# Altium PCB Car_PCB.PcbDoc (part 1 of 2)
Units mm, origin at the board's own origin, x right, y up, seen from the top; angles counter-clockwise.
Board outline 64 x 85 mm, 4 copper layers (Top Layer, Ground Plane, Power Plane, Bottom Layer), stack 0.844 mm thick; 133 components, 86 nets, 370 pads, 90 vias.
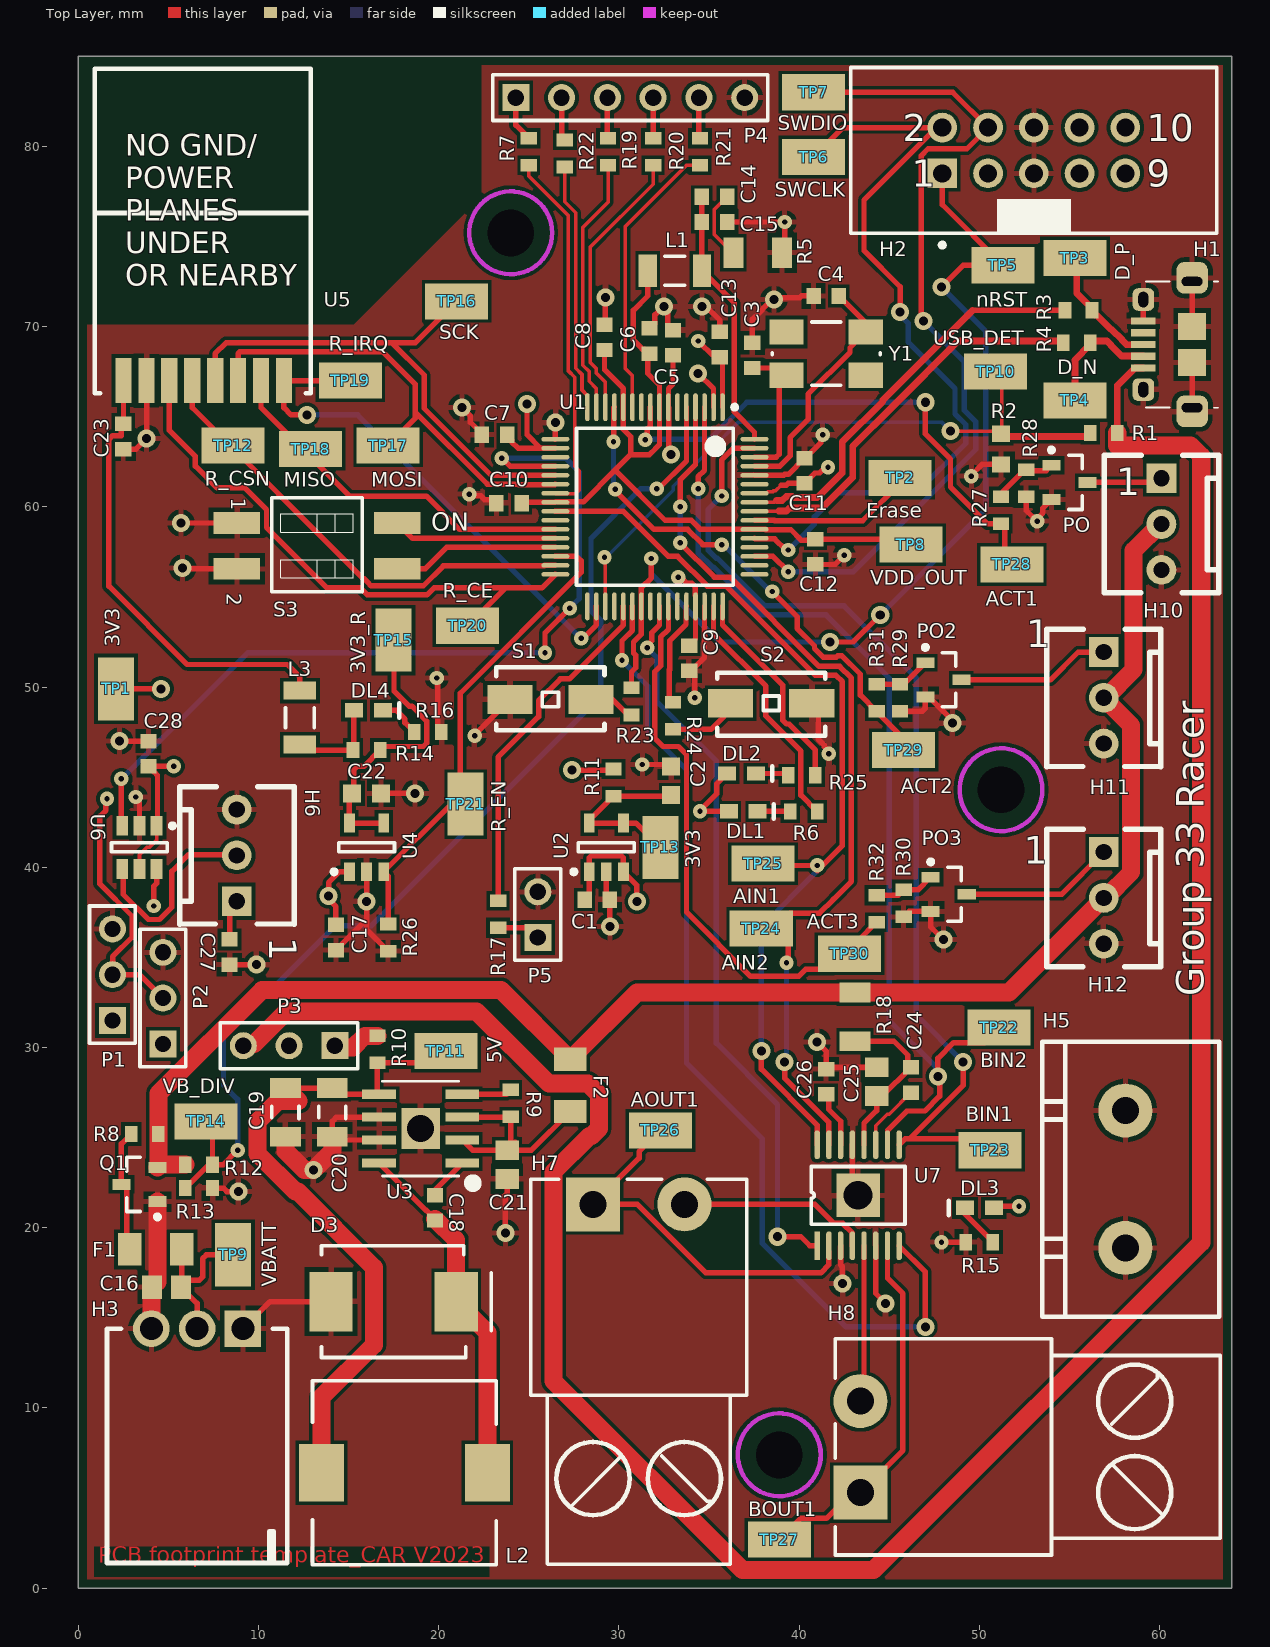
[diagram p0: Top Layer view]
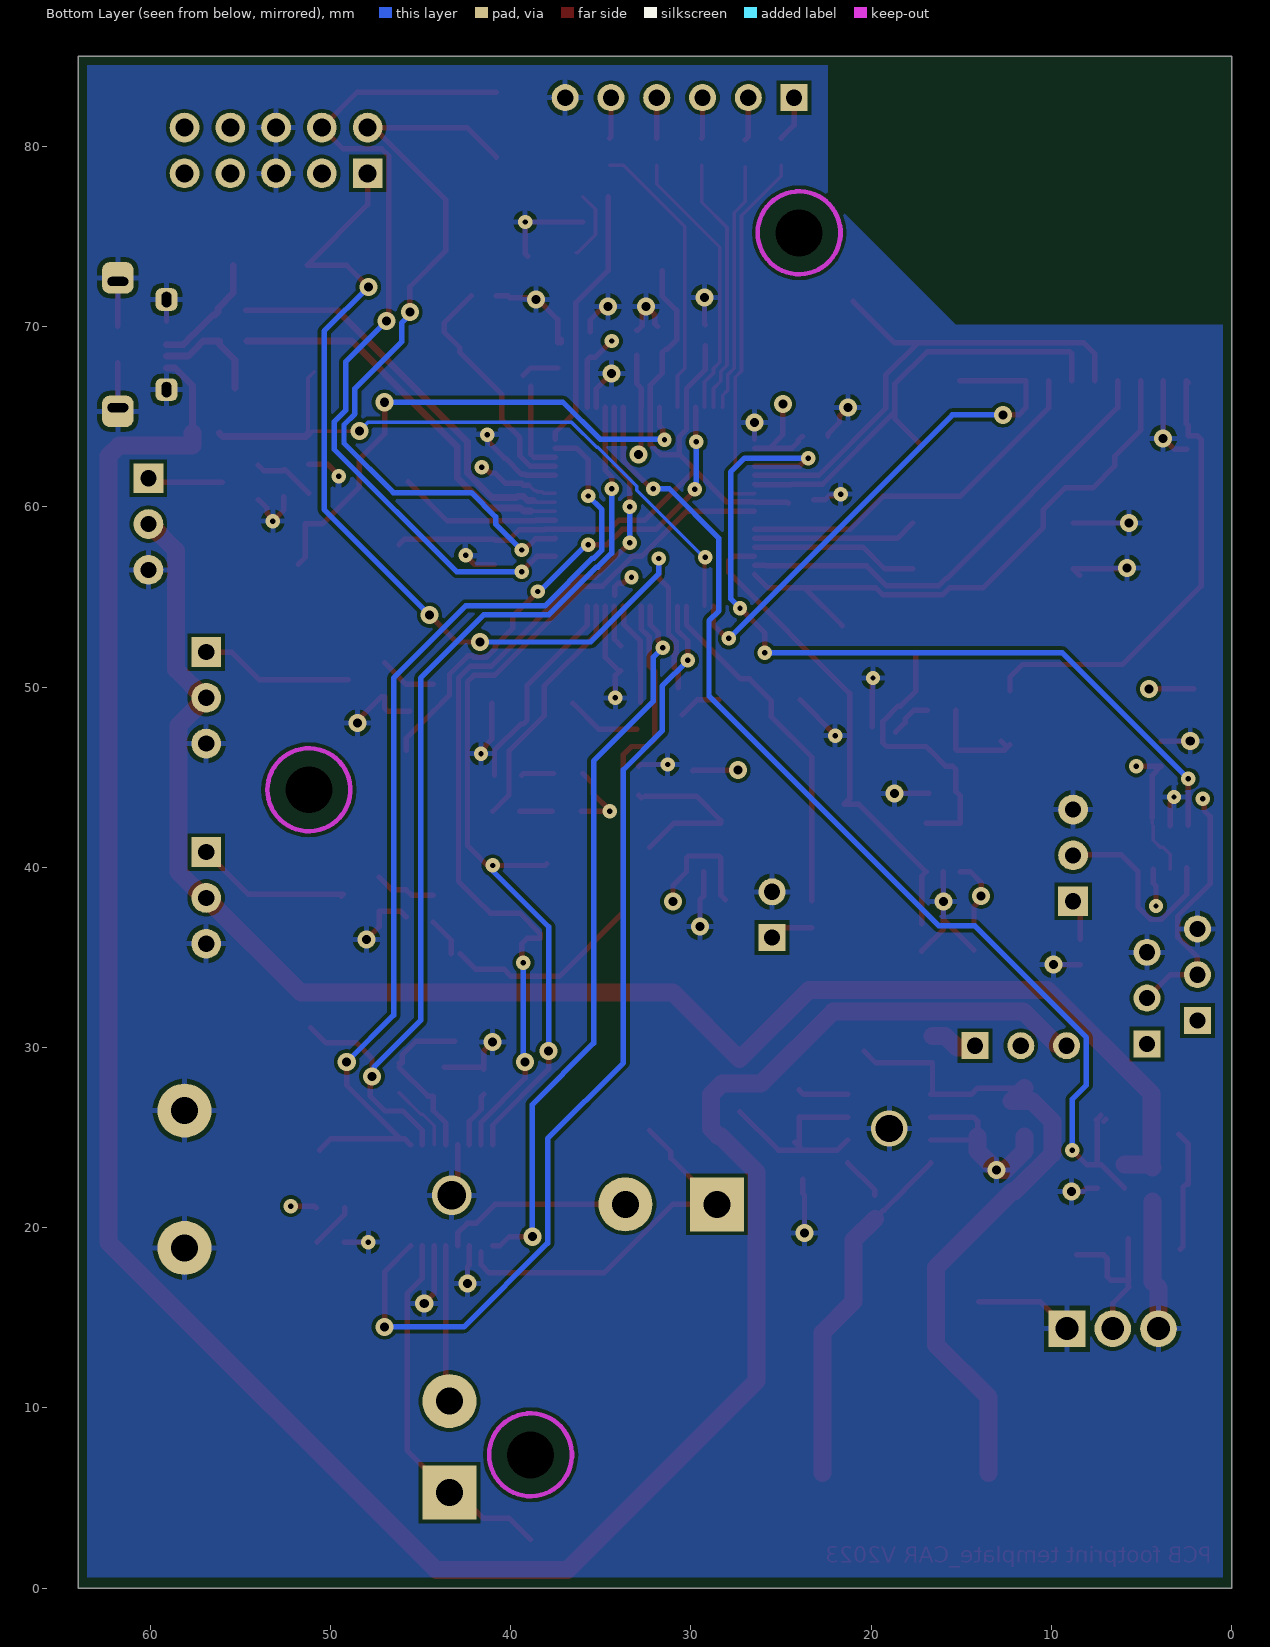
[diagram p1: Bottom Layer view, seen from below]
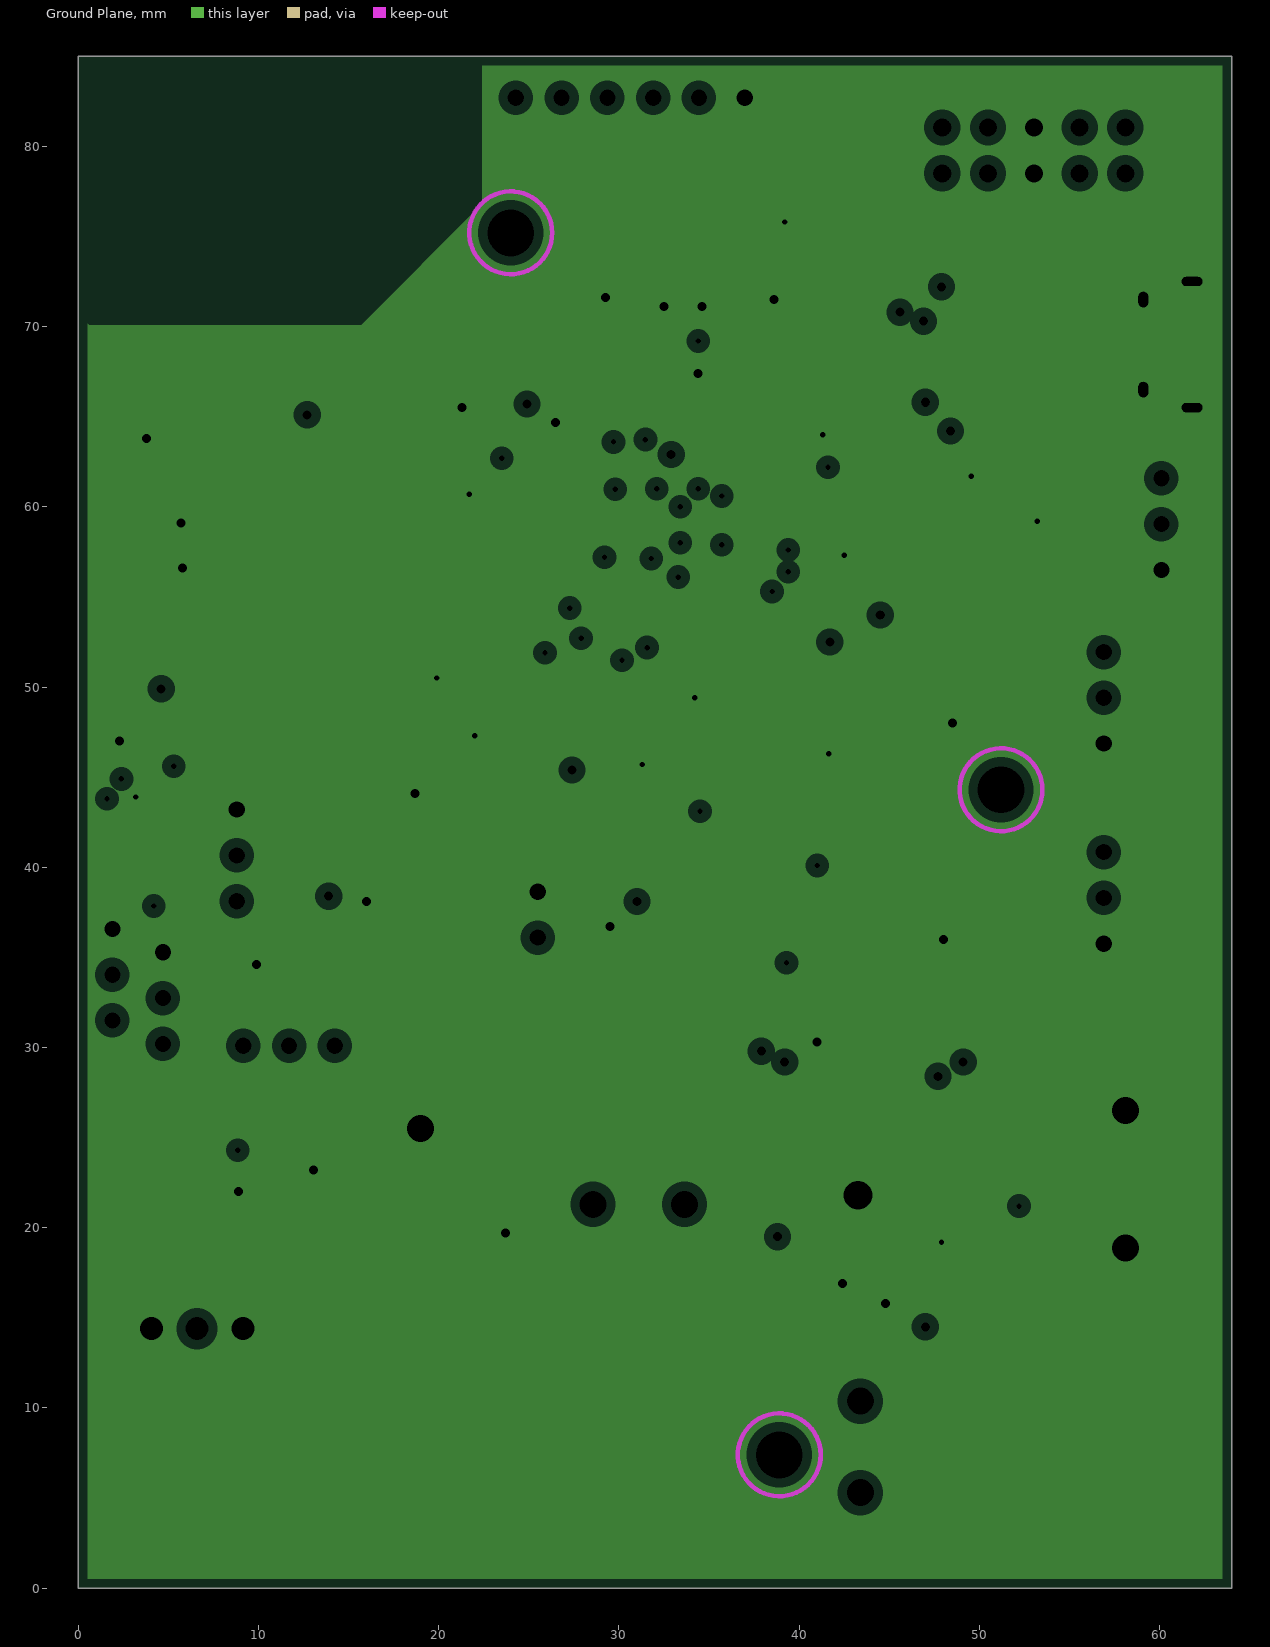
[diagram p2: Ground Plane, clearances drawn from the general rule]
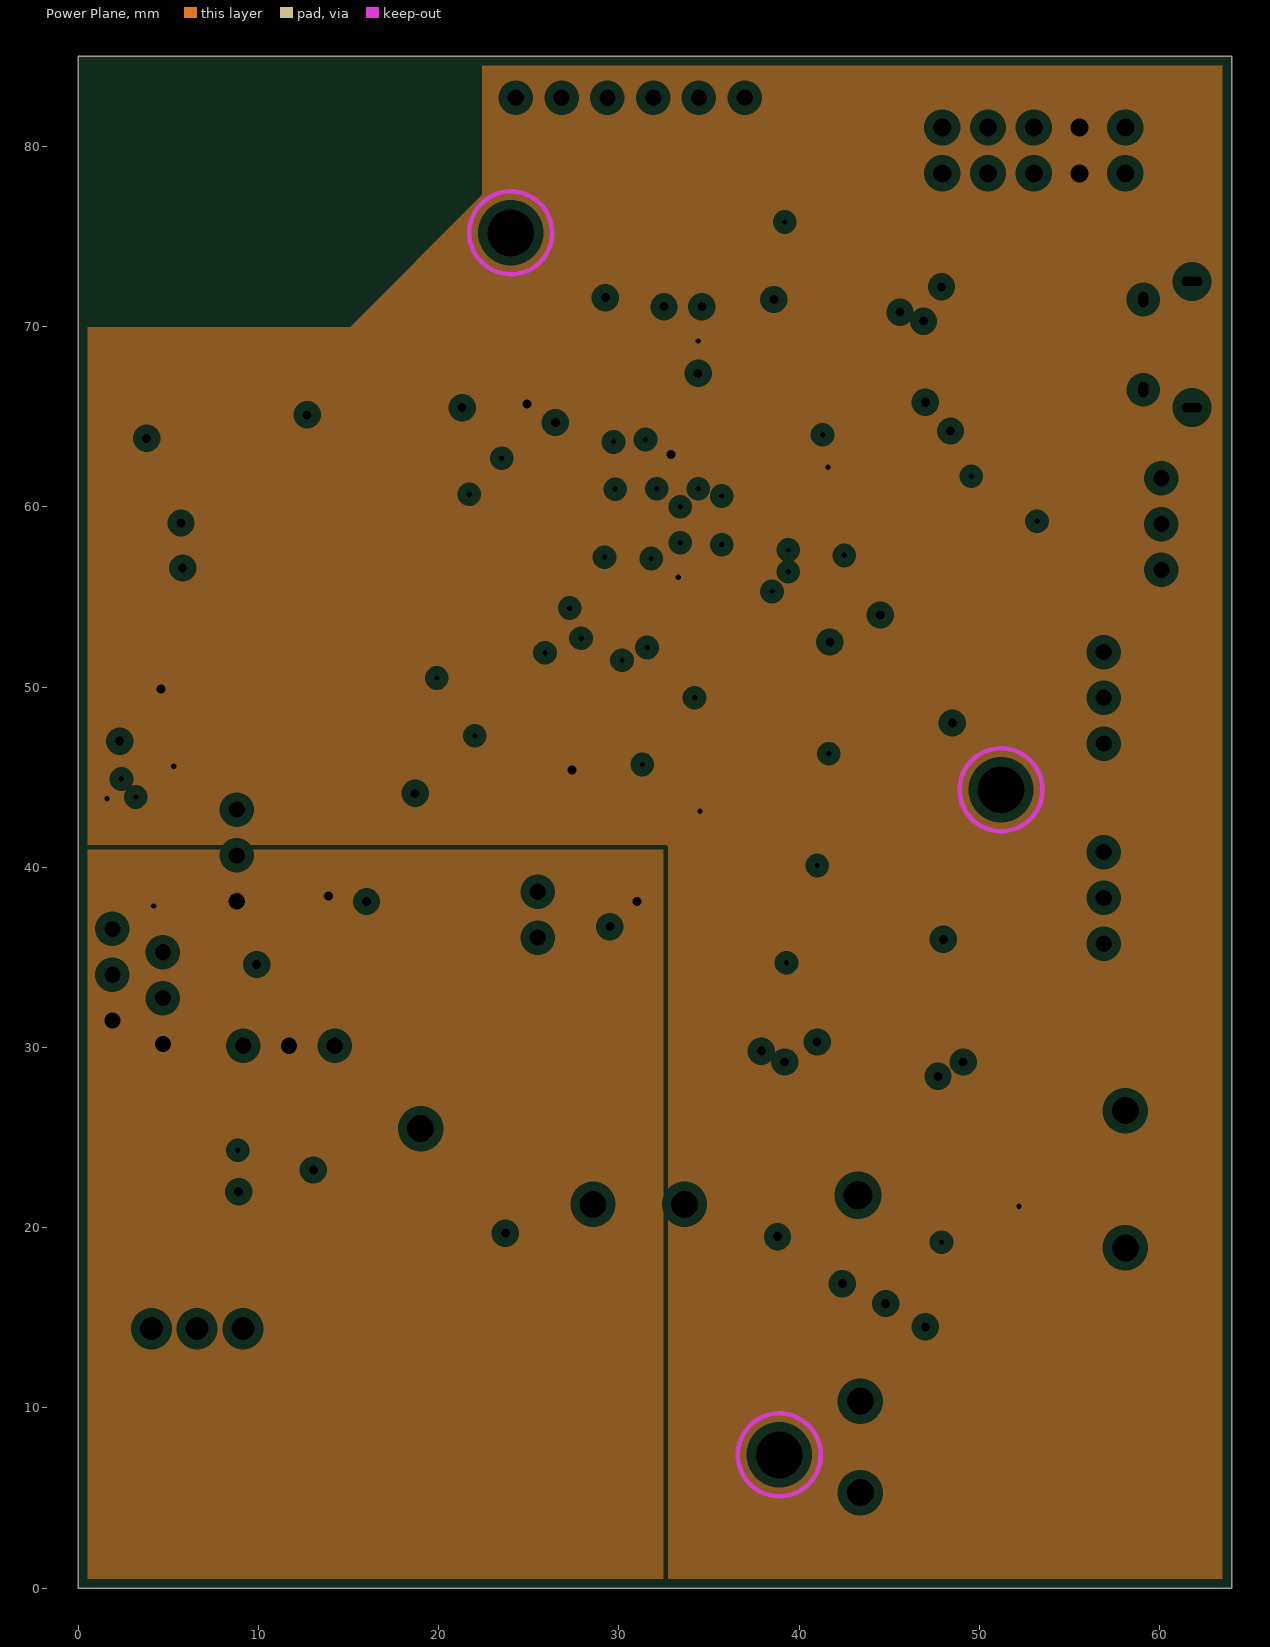
[diagram p3: Power Plane, clearances drawn from the general rule]

## Layer stack, top to bottom
Top Solder: solder mask 0.0102, Solder Resist, Dk 3.5
Top Layer: signal copper 0.0356
Dielectric 1: core 0.32, FR-4, Dk 4.8
Ground Plane: plane copper 0.036, net GND
Dielectric 3: prepreg 0.127, Dk 4.2
Power Plane: plane copper 0.036, net (Multiple Nets)
Dielectric 4: core 0.254, Dk 4.2
Bottom Layer: signal copper 0.0356
Bottom Solder: solder mask 0.0102, Solder Resist, Dk 3.5

## Board outline
0,85 64,85 64,0 0,0 0,85

## Design rules (kind name [scope] priority, off if disabled: settings)
BoardOutlineClearance [All] p1: gap=0.5 ignorepadtopadclearanceinfootprint=FALSE
Clearance GND_POLY [InNamedPolygon('GND')] p1: gap=0.254 ignorepadtopadclearanceinfootprint=FALSE
Clearance Min_Clearance_Circuit_Labs [All] p2: gap=0.2 ignorepadtopadclearanceinfootprint=FALSE
DiffPairsRouting [All] p1: maxlimit=0.254 minlimit=0.254 mostfreqgap=0.254 toplayer_minwidth=0.381 toplayer_maxwidth=0.381 toplayer_prefwidth=0.381 bottomlayer_minwidth=0.381 bottomlayer_maxwidth=0.381 bottomlayer_prefwidth=0.381 maxuncoupledlength=12.7
FanoutControl Fanout_BGA [IsBGA] p1 off: bgadir=Out bgaviamode=Centered fanoutstyle=Auto fanoutdirection=Alternating viagrid=0.025 // Fanout_BGA (Default Rule)
Height [All] p1: minheight=0 maxheight=50.8 prefheight=12.7
HoleSize [All] p1: absolutevalues=TRUE maxlimit=10 minlimit=0.3 maxpercent=80.000 minpercent=20.000
MinimumAnnularRing [All] p1: minimumring=0.1
MinimumSolderMaskSliver [All] p1: minsoldermaskwidth=0.102
NetAntennae [All] p1: netantennaetolerance=1
PlaneClearance [All] p1: clearance=0.508
PlaneConnect [All] p1: planeconnectstyle=Relief reliefexpansion=0.508 reliefentries=4 reliefconductorwidth=0.254 reliefairgap=0.254
PolygonConnect [All] p1: connectstyle=Relief reliefconductorwidth=0.305 reliefentries=4 polygonreliefangle="90 Angle" airgapwidth=0.254
RoutingVias [All] p1: holewidth=0.5 width=1 viastyle="Through Hole" minholewidth=0.3 minwidth=0.8 maxholewidth=1 maxwidth=2
SMDNeckDown [All] p1 off: percent=50.000
SMDToCorner [All] p1: distance=98425
SMDToPlane [All] p1: distance=1968504
SilkToSolderMaskClearance SilkscreenOverComponentPads [IsPad] p1: minsilkscreentomaskgap=0.2 clearancetoexposedcopper=TRUE
SolderMaskExpansion [All] p1: expansion=0.102 istentingtop=FALSE
ViasUnderSMD [All] p1: allowed=FALSE
Width [All] p1: maxlimit=2 minlimit=0.2 preferedwidth=0.3
21 further rules are at their usual default settings.

## Classes and differential pairs
component class Power_Supply: C1 C2 C16 C17 C18 C19 C20 C21 C22 D3 DL3 DL4 F1 F2 H3 L2 P1 P2 P3 Q1 R8 R9 R10 R11 R12 R13 R14 R15 R16 R26 TP9 TP11 TP13 TP14 TP15 TP21 U2 U3 U4
component class Peripherals: C23 C24 C25 C26 C27 C28 H6 H7 H8 H10 H11 H12 L3 P5 PO PO2 PO3 R17 R18 R27 R28 R29 R30 R31 R32 S3 TP12 TP16 TP17 TP18 TP19 TP20 TP22 TP23 TP24 TP25 TP26 TP27 TP28 TP29 TP30 U5 U6 U7
component class MCU: C3 C4 C5 C6 C7 C8 C9 C10 C11 C12 C13 C14 C15 DL1 DL2 H1 H2 H5 L1 P4 R1 R2 R3 R4 R5 R6 R7 R19 R20 R21 R22 R23 R24 R25 S1 S2 TP1 TP2 TP3 TP4 TP5 TP6 TP7 TP8 TP10 U1 Y1
differential pair D: +D_P -D_N

## Components (designator, comment, footprint, x,y, rotation, side; value= is the part's Value field where it differs from the comment)
C1 "1uF" CAPC1608L 28.8,38.2 r0 top
C2 "4.7uF" CAPC1608N 32.9,44.8 r270 top
C3 "27pF" CAPC1608L 37.4,68.4 r270 top
C4 "27pF" CAPC1608L 41.5,71.7 r0 top
C5 "100nF" CAPC1608L 33,69.1 r270 top
C6 "100nF" CAPC1608L 31.7,69.2 r90 top
C7 "100nF" CAPC1608L 23.1,64 r0 top
C8 "100nF" CAPC1608L 29.2,69.4 r90 top
C9 "100nF" CAPC1608L 33.9,51.6 r90 top
C10 "100nF" CAPC1608L 23.9,60.2 r180 top
C11 "100nF" CAPC1608L 40.3,62 r270 top
C12 "100nF" CAPC1608L 40.9,57.5 r270 top
C13 "100nF" CAPC1608L 35.6,69 r270 top
C14 "4.7nF" CAPC1608L 35.3,77.2 r180 top
C15 "100nF" CAPC1608L 35.3,75.8 r180 top
C16 "10uF" CAPC2012L 4.9,16.7 r180 top
C17 "1uF" CAPC1608L 14.3,36.1 r270 top
C18 "100nF" CAPC1608L 19.8,21.1 r90 top
C19 "22uF" CAPC3216L 11.5,26.4 r90 top
C20 "22uF" CAPC3216L 14.1,26.4 r90 top
C21 "10uF" CAPC2012L 23.8,23.5 r90 top
C22 "4.7uF" CAPC1608N 16,44.1 r180 top
C23 "10uF" CAPC1608L 2.5,63.9 r90 top
C24 "10nF" CAPC1608L 46.2,28.2 r90 top
C25 "10uF" CAPC2012L 44.3,28.1 r270 top
C26 "2.2uF" CAPC1608L 41.5,28.1 r90 top
C27 "100nF" CAPC1608L 8.4,35.3 r90 top
C28 "100nF" CAPC1608L 3.9,46.3 r270 top
D3 "MBRS330T3G 30V 4A" SMC 17.5,15.9 r0 top
DL1 "Blue" WL-SMCW0603 37.7,43.1 r180 top
DL2 "Red" WL-SMCW0603 37.6,45.2 r180 top
DL3 "Green" WL-SMCW0603 49.2,21.1 r0 top
DL4 "Green" WL-SMCW0603 16.9,48.7 r180 top
F1 "5A" RESC3216N 4.3,18.8 r180 top
F2 "2A" RESC3216N 27.3,27.9 r270 top
H1 "JS_USB_MICRO_B" FCI_USB_10118194-0001LF 63.25,69 r90 top
H2 "Header 5X2 Vert" IDC2.54-V10D 53.02,79.77 r0 top
H3 "Battery_HEADER_3pin" BATT_HEADER_3POS 6.6,14.4 r180 top
H5 "TERM_BLK_2POS" TERM_BLK_2POS 58.1,18.88 r90 top
H6 "3 Pin Molex KK Hdr" MOLEX_KK_3_HDR 8.8,38.12 r90 top
H7 "JA_TERM_BLK_HDR_2 PIN" TMHDR2 31.1,21.3 r0 top
H8 "JA_TERM_BLK_HDR_2 PIN" TMHDR2 43.4,7.84 r90 top
H10 "3 Pin Molex KK Hdr" MOLEX_KK_3_HDR 60.1,61.58 r270 top
H11 "3 Pin Molex KK Hdr" MOLEX_KK_3_HDR 56.9,51.94 r270 top
H12 "3 Pin Molex KK Hdr" MOLEX_KK_3_HDR 56.9,40.84 r270 top
L1 "1A max, Idc 0.3R," INDC3216L 33.1,73.1 r180 top
L2 "IND 5.2UH 6A" INDUCTOR5u2 18.1,6.4 r180 top
L3 "1A max, Idc 0.3R," INDC3216L 12.3,48.3 r270 top
MT1 "M2.6 NPTH" MNT-HOLE_2.6mm_NPTH 51.2,44.3 r0 top
MT2 "M2.6 NPTH" MNT-HOLE_2.6mm_NPTH 24,75.2 r0 top
MT3 "M2.6 NPTH" MNT-HOLE_2.6mm_NPTH 38.9,7.4 r0 top
P1 "JA_PIN_Header 3" HDR1X3 1.9,31.5 r90 top
P2 "JA_PIN_Header 3" HDR1X3 4.7,30.2 r90 top
P3 "JA_PIN_Header 3" HDR1X3 14.24,30.1 r180 top
P4 "JA_PIN_Header 6" HDR1X6 24.28,82.7 r0 top
P5 "JA_PIN_Header 2" HDR1X2 25.5,36.1 r90 top
PO "BSH105,215" SOT23_L 55,61.35 r0 top
PO2 "BSH105,215" SOT23_L 48,50.4 r0 top
PO3 "BSH105,215" SOT23_L 48.3,38.5 r0 top
Q1 "SSM3J328R,LF" SOT23_L 3.4,22.4 r180 top
R1 "27K" RESC1608L 56.9,64.1 r0 top
R2 "47K" RESC1608N 51.2,63.2 r90 top
R3 "27R" RESC1608L 55.5,70.9 r180 top
R4 "27R" RESC1608L 55.4,69.1 r180 top
R5 "1R" RESC3216L 37.7,74.1 r180 top
R6 "3K" RESC1608L 40.25,43.1 r0 top
R7 "2K" RESC1608L 25,79.7 r90 top
R8 "0R" RESC1608L 3.7,25.2 r0 top
R9 "100K" RESC1608L 24,26.9 r90 top
R10 "0R" RESC1608L 16.6,29.9 r90 top
R11 "0R" RESC1608L 29.7,44.7 r90 top
R12 "100K" RESC1608L 6.7,23.5 r180 top
R13 "68K" RESC1608L 6.7,22.2 r180 top
R14 "0R" RESC1608L 16,46.5 r180 top
R15 "2K2" RESC1608L 50,19.2 r0 top
R16 "2K2" RESC1608L 19.4,47.5 r180 top
R17 "2K" RESC1608L 23.3,37.4 r270 top
R18 "0R" RESC3216L 43.1,31.7 r90 top
R19 "2K" RESC1608L 29.4,79.7 r90 top
R20 "2K" RESC1608L 31.9,79.7 r90 top
R21 "2K" RESC1608L 34.5,79.7 r90 top
R22 "2K" RESC1608L 27,79.6 r90 top
R23 "2K" RESC1608L 30.7,49.2 r90 top
R24 "2K" RESC1608L 33,48.4 r90 top
R25 "3K3" RESC1608L 40.15,45.1 r0 top
R26 "10K" RESC1608L 17.2,36.1 r90 top
R27 "2K" RESC1608L 51.2,59.8 r90 top
R28 "10K" RESC1608L 52.6,61.3 r90 top
R29 "10K" RESC1608L 45.6,49.4 r90 top
R30 "10K" RESC1608L 45.8,38 r90 top
R31 "2K" RESC1608L 44.3,49.4 r90 top
R32 "2K" RESC1608L 44.3,37.7 r90 top
S1 "EVQPNF05M" EVQPNF05M 26.2,49.3 r0 top
S2 "EVQPNF05M" EVQPNF05M 38.45,49.1 r180 top
S3 "WS_SW DIP-2" DIP_SW_2WAY_SMD 8.8,59.1 r270 top
TP1 "3V3" TP_1206 2.1,49.9 r270 top value=TP
TP2 "Erase" TP_1206 45.6,61.6 r180 top value=TP
TP3 "D_P" TP_1206 55.3,73.8 r0 top value=TP
TP4 "D_N" TP_1206 55.3,65.9 r0 top value=TP
TP5 "nRST" TP_1206 51.3,73.4 r0 top value=TP
TP6 "SWCLK" TP_1206 40.8,79.4 r0 top value=TP
TP7 "SWDIO" TP_1206 40.8,83 r0 top value=TP
TP8 "VDD_OUT" TP_1206 46.2,57.9 r180 top value=TP
TP9 "VBATT" TP_1206 8.6,18.5 r270 top value=TP
TP10 "USB_DET" TP_1206 50.9,67.5 r0 top value=TP
TP11 "5V" TP_1206 20.4,29.8 r0 top value=TP
TP12 "R_CSN" TP_1206 8.6,63.4 r0 top value=TP
TP13 "3V3" TP_1206 32.3,41.1 r270 top value=TP
TP14 "VB_DIV" TP_1206 7.1,25.9 r0 top value=TP
TP15 "3V3_R" TP_1206 17.5,52.6 r270 top value=TP
TP16 "SCK" TP_1206 21,71.4 r0 top value=TP
TP17 "MOSI" TP_1206 17.2,63.4 r0 top value=TP
TP18 "MISO" TP_1206 12.9,63.2 r180 top value=TP
TP19 "R_IRQ" TP_1206 15.1,67 r180 top value=TP
TP20 "R_CE" TP_1206 21.6,53.4 r180 top value=TP
TP21 "R_EN" TP_1206 21.5,43.5 r90 top value=TP
TP22 "BIN2" TP_1206 51.1,31.1 r0 top value=TP
TP23 "BIN1" TP_1206 50.6,24.3 r0 top value=TP
TP24 "AIN2" TP_1206 37.9,36.6 r0 top value=TP
TP25 "AIN1" TP_1206 38,40.2 r0 top value=TP
TP26 "AOUT1" TP_1206 32.3,25.4 r180 top value=TP
TP27 "BOUT1" TP_1206 38.9,2.7 r180 top value=TP
TP28 "ACT1" TP_1206 51.8,56.8 r180 top value=TP
TP29 "ACT2" TP_1206 45.8,46.5 r180 top value=TP
TP30 "ACT3" TP_1206 42.8,35.2 r180 top value=TP
U1 "ATSAM4S8BA-ANR" LQFP64_L 32,60 r270 top locked
U2 "CAT6219-330TDGT3" SOT95P280X145-5N 29.3,41.1 r90 top
U3 "ADP2302ARDZ-5.0 BUCK" RD_8_1 19,25.5 r180 top locked value=Value
U4 "CAT6219-330TDGT3" SOT95P280X145-5N 16,41.1 r90 top
U5 "nRF24 SMD" NRF24 0.914,66.3 r0 top
U6 "SN74LVC1T45" SOT23-6_N 3.4,41.1 r270 top
U7 "DRV8833" "HTSOP16 DRV8833" 41,19 r90 top locked
Y1 "12MHz" 6.0X3.5-4 41.5,68.5 r180 top

## Footprints (in the part's own frame and the unit in brackets; to place one, negate y for a bottom-side part, rotate by r counter-clockwise, add the part's x,y. Pads: shape width x height; smd on the part's side, far side on the other; paste and mask are expansions set on the pad)
6.0X3.5-4 [mm] "4 SMD 6.0X3.5 mm No Lead Crystal"
  rect 1.9x1.4 smd: 1(-2.2,-1.2) 2(2.2,-1.2) 3(2.2,1.2) 4(-2.2,1.2)
  silkscreen extent -3,-1.75 3,1.75, body extent -3,-1.75 3,1.75, height 1.2
BATT_HEADER_3POS [mil]
  rect 80x80 hole 50: 1(-100,0)
  round 80 hole 50: 2(0,0) 3(100,0)
  silkscreen extent -197,0 197,512, body extent -197,-31 200,504, height 294
CAPC1608L [mm] "Chip Capacitor, Body 1.6x0.8mm, IPC High Density"
  rect 0.8x0.9 smd: 1(-0.7,0) 2(0.7,0)
  body extent -0.87,-0.48 0.87,0.48, height 0.85
CAPC1608N [mm] "Chip Capacitor, Body 1.6x0.8mm, IPC Medium Density"
  rect 1x1 smd: 1(-0.8,0) 2(0.8,0)
  body extent -0.87,-0.48 0.87,0.48, height 0.85
CAPC2012L [mm] "Chip Capacitor, Body 2.0x1.3mm, IPC High Density"
  rect 1.1x1.3 smd: 1(-0.8,0) 2(0.8,0)
  body extent -1.1,-0.72 1.1,0.72, height 1.1
CAPC3216L [mm] "Chip Capacitor, Body 3.2x1.6mm, IPC High Density"
  rect 1.1x1.7 smd: 1(-1.35,0) 2(1.35,0)
  silkscreen extent -0.35,-0.75 0.35,0.75, body extent -1.7,-0.9 1.7,0.9, height 1.35
DIP_SW_2WAY_SMD [mm] "DIP Switch; 4 Leads"
  rect 1.2x2.6 smd: 1(0,0) 2(2.54,0) 3(2.54,8.9) 4(0,8.9)
  silkscreen extent -1.4,1.95 3.81,6.95
EVQPNF05M [mm] "Panansonic light touch SMD push button switch"
  rect 2.5x1.6 smd: 1(-2.25,0) 2(2.25,0)
  silkscreen extent -3,-1.7 3,1.8, body extent -3,-1.7 3,1.8, height 5
FCI_USB_10118194-0001LF [mm] "Micro USB B Type Receptacle"
  rect 0.4x1.35 smd mask+0.07: 1(-1.3,4.15) 2(-0.65,4.15) 3(0,4.15) 4(0.65,4.15) 5(1.3,4.15)
  rrect50% 1.75x1.75 hole 0.5 slot 1.15 at 90 deg copper offset -0.2,0 paste-2539.97 mask+0.1: 6(-3.5,1.45)
  rrect50% 1.25x1.2 hole 0.55 slot 0.85 at 0 deg: 6(-2.5,4.15) 6(2.5,4.15)
  rect 1.5x1.55 smd: 6(-1,1.45) 6(1,1.45)
  rrect50% 1.75x1.75 hole 0.5 slot 1.15 at 90 deg copper offset 0.2,0 paste-2539.97 mask+0.1: 6(3.5,1.45)
  silkscreen extent -3.5,0 3.5,4
HDR1X2 [mm] "Connector; Header; 2 Position"
  rect 1.5x1.5 hole 0.9: 1(0,0)
  round 1.5 hole 0.9: 2(2.54,0)
  silkscreen extent -1.27,-1.27 3.81,1.27, body extent -1.25,-1.25 3.79,1.25, height 8.54
HDR1X3 [mm] "Connector; Header; 3 Position"
  rect 1.5x1.5 hole 0.9: 1(0,0)
  round 1.5 hole 0.9: 2(2.54,0) 3(5.08,0)
  silkscreen extent -1.27,-1.27 6.35,1.27, body extent -1.27,-1.27 6.35,1.27, height 8.89
HDR1X6 [mm] "Connector; Header; 6 Position"
  rect 1.5x1.5 hole 0.9: 1(0,0)
  round 1.5 hole 0.9: 2(2.54,0) 3(5.08,0) 4(7.62,0) 5(10.16,0) 6(12.7,0)
  silkscreen extent -1.27,-1.27 13.97,1.27, body extent -1.27,-1.27 13.97,1.27, height 8.89
"HTSOP16 DRV8833" [mm]
  rect 1.6x0.3 smd: 1(0,0)
  oval 1.6x0.3 smd: 2(0,-0.65) 3(0,-1.3) 4(0,-1.95) 5(0,-2.6) 6(0,-3.25) 7(0,-3.9) 8(0,-4.55) 9(5.6,-4.55) 10(5.6,-3.9) 11(5.6,-3.25) 12(5.6,-2.6) 13(5.6,-1.95) 14(5.6,-1.3) 15(5.6,-0.65) 16(5.6,0)
  rect 2.4x2.4 smd: 17(2.8,-2.275)
  silkscreen extent 1.2,-4.88 4.4,0.33, body extent -0.4,-4.77 6,0.23, height 1.13
IDC2.54-V10D [mm] "Connector; IDC, Low Profile Male Header, Thru-Hole; 10 Position; Vertical; Pitch 2.54 mm; Body 20.32 x 9.2 x 9.45 mm (LxWxH)"
  rect 1.65x1.65 hole 1: 1(-5.08,-1.27)
  round 1.65 hole 1: 2(-5.08,1.27) 3(-2.54,-1.27) 4(-2.54,1.27) 5(0,-1.27) 6(0,1.27) 7(2.54,-1.27) 8(2.54,1.27) 9(5.08,-1.27) 10(5.08,1.27)
  silkscreen extent -10.16,-5.37 10.16,4.6, body extent -10.16,-4.6 10.16,4.6, height 9.45
INDC3216L [mm] "Chip Inductor, Body 3.2x1.6mm, IPC High Density"
  rect 1x1.8 smd: 1(-1.5,0) 2(1.5,0)
  silkscreen extent -0.55,-0.8 0.55,0.8, body extent -1.75,-0.95 1.75,0.95, height 1.9
INDUCTOR5u2 [mm]
  rect 2.5x3.2 smd: 1(-4.6,0) 2(4.6,0)
  silkscreen extent -5.1,-5.1 5.1,5.1, body extent -5,-5 5,5, height 3.8
LQFP64_L [mm] "Thin QFP, 64-Leads, Body 10x10mm, Pitch 0.5mm, IPC High Density"
  oval 1.55x0.25 smd mask+0.07: 1(-5.525,3.75) 2(-5.525,3.25) 3(-5.525,2.75) 4(-5.525,2.25) 5(-5.525,1.75) 6(-5.525,1.25) 7(-5.525,0.75) 8(-5.525,0.25) 9(-5.525,-0.25) 10(-5.525,-0.75) 11(-5.525,-1.25) 12(-5.525,-1.75) 13(-5.525,-2.25) 14(-5.525,-2.75) 15(-5.525,-3.25) 16(-5.525,-3.75) 33(5.525,-3.75) 34(5.525,-3.25) 35(5.525,-2.75) 36(5.525,-2.25) 37(5.525,-1.75) 38(5.525,-1.25) 39(5.525,-0.75) 40(5.525,-0.25) 41(5.525,0.25) 42(5.525,0.75) 43(5.525,1.25) 44(5.525,1.75) 45(5.525,2.25) 46(5.525,2.75) 47(5.525,3.25) 48(5.525,3.75)
  oval 0.25x1.55 smd mask+0.07: 17(-3.75,-5.525) 18(-3.25,-5.525) 19(-2.75,-5.525) 20(-2.25,-5.525) 21(-1.75,-5.525) 22(-1.25,-5.525) 23(-0.75,-5.525) 24(-0.25,-5.525) 25(0.25,-5.525) 26(0.75,-5.525) 27(1.25,-5.525) 28(1.75,-5.525) 29(2.25,-5.525) 30(2.75,-5.525) 31(3.25,-5.525) 32(3.75,-5.525) 49(3.75,5.525) 50(3.25,5.525) 51(2.75,5.525) 52(2.25,5.525) 53(1.75,5.525) 54(1.25,5.525) 55(0.75,5.525) 56(0.25,5.525) 57(-0.25,5.525) 58(-0.75,5.525) 59(-1.25,5.525) 60(-1.75,5.525) 61(-2.25,5.525) 62(-2.75,5.525) 63(-3.25,5.525) 64(-3.75,5.525)
  silkscreen extent -5.65,-4.35 4.35,4.55, body extent -5,-5 5,5, height 1.6
MNT-HOLE_2.6mm_NPTH [mm] "Mounting Hole 2.6mm non plated"
  round 0 hole 2.6 unplated: 1(0,0)
  Keep-Out Layer circle w0.254: c0,0 r2.3
MOLEX_KK_3_HDR [mil] "MOLEX_KK_3_HDR"
  rect 65x65 hole 35.43: 1(0,0)
  round 65 hole 35.43: 2(100,0) 3(200,0)
  silkscreen extent -50,-125 250,125, body extent -50,-114 250,114, height 461
NRF24 [mm]
  rect 0.9x2.5 smd: 1(1.6,0.7) 2(2.871,0.7) 3(4.143,0.7) 4(5.414,0.7) 5(6.686,0.7) 6(7.957,0.7) 7(9.229,0.7) 8(10.5,0.7)
  silkscreen extent 0,0 12,18, body extent 0,0 12,18, height 2.27
RD_8_1 [mil]
  rect 74x20 smd paste+0 mask+0: 1(-91,75) 2(-91,25) 3(-91,-25) 4(-91,-75) 5(91,-75) 6(91,-25) 7(91,25) 8(91,75)
  rect 84.65x90 smd paste-44.5 mask+0: EPAD(0,0)
  silkscreen extent -118,-104 84,123, body extent 0,0 10,10, height 10
RESC1608L [mm] "Chip Resistor, Body 1.6x0.8mm, IPC High Density"
  rect 0.7x0.9 smd: 1(-0.75,0) 2(0.75,0)
  body extent -0.85,-0.48 0.85,0.48, height 0.9
RESC1608N [mm] "Chip Resistor, Body 1.6x0.8mm, IPC Medium Density"
  rect 0.9x1 smd: 1(-0.85,0) 2(0.85,0)
  body extent -0.85,-0.48 0.85,0.48, height 0.6
RESC3216L [mm] "Chip Resistor, Body 3.1x1.6mm, IPC High Density"
  rect 1.1x1.7 smd: 1(-1.35,0) 2(1.35,0)
  body extent -1.68,-0.87 1.68,0.87, height 2.54
RESC3216N [mm] "Chip Resistor, Body 3.2x1.6mm, IPC Medium Density"
  rect 1.3x1.8 smd: 1(-1.45,0) 2(1.45,0)
  body extent -1.68,-0.87 1.68,0.87, height 0.71
SMC [mm] "DO-214-AB/SMC; 2 C-Bend Leads; Body 7.9 x 5.9 mm, inc. leads (LxW)"
  rect 2.4x3.3 smd: 1(-3.475,0) 2(3.475,0)
  silkscreen extent -4,-3.1 5.43,3.1, body extent -4.22,-2.95 3.72,2.95, height 2.27
SOT23-6_N [mm]
  rect 1.1x0.65 smd: 1(-1.2,0.95) 2(-1.2,0) 3(-1.2,-0.95) 4(1.2,-0.95) 5(1.2,0) 6(1.2,0.95)
  silkscreen extent -1.32,-1.55 0.25,1.95, body extent -0.9,-1.55 0.9,1.55, height 1.45
SOT23_L [mm] "SOT23, 3-Leads, Body 2.9x1.3mm, Pitch 0.95mm, Lead Span 2.3mm, IPC High Density"
  rect 1x0.6 smd: 1(-1,0.95) 2(-1,-0.95) 3(1,0)
  silkscreen extent -1.12,-1.5 0.7,1.92, body extent -0.7,-1.5 0.7,1.5, height 1.1
SOT95P280X145-5N [mm] "SOT23, 5-Leads, Body 2.90x2.80mm, Pitch 0.95mm, IPC Medium Density"
  rect 1.05x0.6 smd: 1(-1.35,0.95) 2(-1.35,0) 3(-1.35,-0.95) 4(1.35,-0.95) 5(1.35,0.95)
  silkscreen extent -1.47,-1.55 0.25,1.92, body extent -0.87,-1.52 0.87,1.53, height 1.45
TERM_BLK_2POS [mm]
  round 3 hole 1.5: 1(0,0) 2(7.62,0)
  silkscreen extent -3.81,-5.2 11.43,4.6
TMHDR2 [mm] "5.08mm Pluggable Terminal Header 2 pole"
  rect 3x3 hole 1.5: 1(-2.54,0)
  round 3 hole 1.5: 2(2.54,0)
  silkscreen extent -6,-19.97 6,1.4, body extent -6,-19.97 6,1.4, height 15
TP_1206 [mm] "Test Point Pad"
  rect 3.5x2 smd: 1(0,0)
  body extent -1.62,-0.85 1.63,0.8, height 2
WL-SMCW0603 [mm] "2.4 x 0.8 x 0.7mm LED"
  rect 1x0.8 smd: 1(0,0) 2(1.6,0)
  silkscreen extent -0.9,-0.4 -0.9,0.4

## Part data
C1 C17: library part CC_1uF_0603, "CAP CER 1uF Y5V -20% +80% 16V 0603", Max Voltage=16V, Code_IPC="1608 [0603]", PackageReference=0603, Storage Location="PCB Assembly WS", Supplier="ECE Dept"
C2 C22: library part CC_4.7uF_0603, "CAP CER 4.7uF X5R +-20%  10V 0603", Max Voltage=10V, Code_IPC=2012[0805], Note="Footprint corresponds to dimensions for bulk cassette packaging. This case size has tightened tolerances.", PackageReference=0805, Storage Location="PCB Assembly WS", Supplier="ECE Dept"
C3 C4: library part CC_27pF_0603, "CAP CER 27pF NPO/COG +-5% 50V 0603", Code_IPC="1608 [0603]", PackageReference=0603, Storage Location="PCB Assembly WS", Supplier="ECE Dept"
C5 C6 C7 C8 C9 C10 C11 C12 C13 C15 C18 C27 C28: library part CC_100nF_0603, "CAP CER 100nF X7R +-10% 50V 0603", Code_IPC="1608 [0603]", PackageReference=0603, Storage Location="PCB Assembly WS", Supplier="ECE Dept"
C14: library part CC_4.7nF_0603, "CAP CER 4.7nF X7R +-10% 50V 0603", Code_IPC="1608 [0603]", PackageReference=0603, Storage Location="PCB Assembly WS", Supplier="ECE Dept"
C16 C21 C25: library part CC_10uF_0805_16V, "CAP CER 10uF X5R 16V 0805", Manufacturer="Samsung Electro-Mechanics", Manufacturer Part Number=CL21A106KOQNNWE, Max Voltage=16V, Operating Temperature="-55°C ~ 85°C", Package / Case="0805 (2012 Metric)", Ratings=-, Supplier Part Number 1=1276-2894-1-ND, Temperature Coefficient=X5R, Tolerance=±10%, Applications="General Purpose", Category=Capacitors, Code_IPC=2012[0805], ComponentLink1Description=http://www.samsungsem.com/kr/support/product-search/mlcc/CL21A106KOQNNWE.jsp, ComponentLink1URL=http://www.samsungsem.com/kr/support/product-search/mlcc/CL21A106KOQNNWE.jsp, Features=-, Height - Seated (Max)=-, Lead Spacing=-, Lead Style=-, Mounting Type="Surface Mount, MLCC", Note="Footprint corresponds to dimensions for bulk cassette packaging. This case size has tightened tolerances.", Notification="Current market demand for these product types have resulted in fluctuating and extending lead times. Lead times may differ.", PackageReference=0805, Packaging="Cut Tape (CT)", Part Status=Active, Pricing 1="1=0.35, 10=0.25, 100=0.1178, 500=0.08254, 1000=0.06831 (NZD)", RoHS="RoHS Compliant", Size / Dimension="0.079\" L x 0.049\" W (2.00mm x 1.25mm)", Stock 1=20000, Supplier 1=Digi-Key, Thickness (Max)="0.055\" (1.40mm)", Voltage - Rated=16V
C19 C20: library part CC_22uF_1206, "CAP CER 22uF Y5V -20% +80% 10V 1206", Dielectric=Y5V, Max Voltage=10V, Storage Location="PCB Assembly WS", Supplier="ECE Dept"
C23: library part CC_10uF_0603, "CAP CER 10UF X5R +-20% 6V3 0603", Voltage - Rated=6.3V, Storage Location="PCB Assembly WS", Supplier="ECE Dept"
C24: library part CC_10nF_0603, "CAP CER 10nF X7R +-10% 50V 0603", Code_IPC="1608 [0603]", PackageReference=0603, Storage Location="PCB Assembly WS", Supplier="ECE Dept"
C26: library part CC_2.2uF_0603, "CAP CER 2.2uF X5R +-20% 10V 0603", Max Voltage=10V, Code_IPC="1608 [0603]", PackageReference=0603, Storage Location="PCB Assembly WS", Supplier="ECE Dept"
D3: library part MBRS330T3G, "SCHOTTKY  30V 4A", Base Part Number=MBRS330, Capacitance @ Vr, F=-, Current - Average Rectified (Io)=4A, Manufacturer="ON Semiconductor", Operating Temperature - Junction="-65°C ~ 150°C", Package / Case="DO-214AB, SMC", Supplier Device Package=SMC, Supplier Part Number 1=MBRS330T3GOSCT-ND, Category="Discrete Semiconductor Products", ComponentLink1Description=http://www.onsemi.com/pub/Collateral/MBRS340T3-D.PDF, ComponentLink1URL=http://www.onsemi.com/pub/Collateral/MBRS340T3-D.PDF, Diode Type=Schottky, Manufacturer Part Number=MBRS330T3G, Mounting Type="Surface Mount", Packaging="Cut Tape (CT)", Part Status=Active, Pricing 1="1=0.93, 10=0.79, 100=0.5902, 500=0.46368, 1000=0.35829 (NZD)", RoHS="RoHS Compliant", Speed="Fast Recovery =< 500ns, > 200mA (Io)", Stock 1=8919, Supplier 1=Digi-Key
DL1: library part DL_150060BS75000, "LED Blue 270mcd 0603 SMD", Forward Current If=30, Forward Voltage=3.2, Manufacturer="WURTH ELEKTRONIK", Manufacturer Part Number=150060BS75000, Supplier Part Number 1=2322069, LED Colour=Blue, Luminous Intensity=270, Pricing="1=0.3844, 50=0.3252, 100=0.2957, 500=0.2365 (NZD)", Storage Location="PCB Assembly WS", Supplier="ECE Dept", Supplier 1=Farnell, Viewing Angle=120°, Wavelength Typ=470
DL2: library part DL_150060RS75000, "LED Red 250mcd 0603 SMD", Forward Current If=30, Forward Voltage=2, Manufacturer="WURTH ELEKTRONIK", Manufacturer Part Number=150060RS75000, Supplier Part Number 1=2322071, LED Colour=Red, LED Mounting=SMD, Lens Shape=Rectangular, Luminous Intensity=250, Storage Location="PCB Assembly WS", Supplier="ECE Dept", Supplier 1=Farnell, Viewing Angle=140°, Wavelength Typ=625
DL3 DL4: library part DL_150060GS75000, "LED Green 430mcd 0603 SMD", Forward Current If=30, Forward Voltage=3.2, Manufacturer="WURTH ELEKTRONIK", Manufacturer Part Number=150060GS75000, Supplier Part Number 1=2322070, LED Colour=Green, LED Mounting=SMD, Lens Shape=Rectangular, Luminous Intensity=430, Storage Location="PCB Assembly WS", Supplier="ECE Dept", Supplier 1=Farnell, Viewing Angle=140°, Wavelength Typ=520
F1: library part FS_Fuse_5.0A, "Fuse 5.0A Fast Acting 1206 SMD", Case Code (Imperial)=1206, Case Code (Metric)=3216, DC Cold Resistance=19mR, Manufacturer="Bel TRP", Manufacturer Part Number=C1F5, Max Operating Temperature=125°C, Min Operating Temperature=-55°C, Supplier Part Number 1=507-1886-1-ND, Voltage Rating=125V, Voltage Rating (DC)=63V, Approvals=CE,cURus, Case/Package=1206, ComponentLink1Description=http://www.farnell.com/datasheets/2571625.pdf, ComponentLink1URL=http://www.farnell.com/datasheets/2571625.pdf, ComponentLink2Description=http://belfuse.com/pdfs/C1F.pdf, ComponentLink2URL=http://belfuse.com/pdfs/C1F.pdf, ComponentLink3Description=http://www.mouser.com/ds/2/643/C1F-594910.pdf, ComponentLink3URL=http://www.mouser.com/ds/2/643/C1F-594910.pdf, ComponentLink4Description=https://belfuse.com/resources/StewartConnector/C1F.pdf, ComponentLink4URL=https://belfuse.com/resources/StewartConnector/C1F.pdf, Contact Plating=Nickel,Tin, Current Rating=5A, Fuse Type="Board Mount (Cartridge Style Excluded)", Length=0.126inch, Mount="Surface Mount", Number of Pins=2, Packaging="Tape and Reel", Pricing 1="1=0.32, 5=0.312, 10=0.298, 50=0.2662, 100=0.2479, 250=0.22032, 500=0.1836, 1000=0.17442 (USD)", Stock 1=725, Supplier 1=Digi-Key, Supplier 2=Element14, Supplier Part Number 2=2848595, Voltage Rating (AC)=125V, Width=0.062inch
F2: library part FS_Fuse_2.0A, "Fuse 2.0A Very Fast Acting 1206 SMD", Manufacturer=MULTICOMP, Manufacturer Part Number="MC12CF 002", Supplier Part Number 1=1841029, Manufacturer PN="MC12CF 002", Storage Location="PCB Assembly WS", Supplier="ECE Dept", Supplier 1=Farnell
H1: library part JS_USB_MICRO_B_SMT, "CONN USB MICRO B RECPT SMT R/A", Manufacturer=FCI, Manufacturer Part Number=10118194-0001LF, Supplier Part Number 1=609-4618-1-ND, Features="Shielded, Solder Retention", Gender=Receptacle, Mounting Type="Surface Mount, Right Angle, Horizontal", Number of Contacts=5, Specifications="USB 2.0", Supplier 1=Digi-Key
H2: library part JA_HDR_IDC_5X2_VERT, "IDC Header, 2,54mm, 10-Pin, Vert", Supplier Part Number 1=1096985, Storage Location="ECE Dept Store", Supplier="ECE Dept", Supplier 1=Farnell
H3: "3Pin Header 2.54mm spacing / Digikey #WM22663-ND", Supplier Part Number 1=WM22663-ND, Supplier 1=Digi-Key
H5: "2 Position Terminal Block 7.62mm spacing"
H6: library part LED_Strip_Header, "CONN HEADER 3POS 2.54mm VERT_Thru Hole", Manufacturer=Molex, Manufacturer PN=22-23-2031, Supplier Part Number 1=9731156, Storage Location="ECE Dept Store", Supplier="ECE Dept", Supplier 1=Farnell
H7 H8: "TERM_BLK_HEADER 5.08mm 2 Pos R/A Thru Hole", Manufacturer="Phoenix Contact", Manufacturer Part Number=1727010, Max Current Rating=12A, Max Supply Voltage=160V, Supplier Part Number 1=3704579, Storage Location="ECE Dept Store", Supplier="ECE Dept", Supplier 1=Farnell, Supplier 2=Digi-Key, Supplier Part Number 2=277-1947-ND
H10 H11 H12: library part JA_MOLEX_KK_3POS, "CONN HEADER 3POS 2.54mm VERT_Thru Hole", Manufacturer=Molex, Manufacturer PN=22-23-2031, Supplier Part Number 1=9731156, Storage Location="ECE Dept Store", Supplier="ECE Dept", Supplier 1=Farnell
L1 L3: library part IN_Ferrite-Bead, "Ferrite Bead, Rdc 0.3R, Z100MHZ 600R, Imax 1A, SMD 1206", DC Current Rating=1, DC Resistance Max=0.08, Ferrite Case Style="1206 ^3216 Metric]", Frequency Range="50MHz to 1", Impedance Tolerance="± 25%", Manufacturer=FAIR-RITE, Manufacturer Part Number=2512066017Y1, Supplier Part Number 1=1612060, Ferrite Mounting=SMD, Impedance=600, Manufacturer PN=2512066017Y1, Storage Location="PCB Assembly WS", Supplier="ECE Dept", Supplier 1=Farnell
L2: library part CDRH104RNP-5R2NC, "FIXED IND 5.2UH 6A 22 MOHM SMD", Current - Saturation=5.6A, DC Resistance (DCR)="22 mOhm Max", Frequency - Self Resonant=-, Manufacturer="Sumida America Components Inc.", Operating Temperature="-40°C ~ 100°C", Package / Case=Nonstandard, Supplier Part Number 1=308-2280-1-ND, Tolerance=±30%, Category="Inductors, Coils, Chokes", ComponentLink1Description=http://products.sumida.com/products/pdf/CDRH104R.pdf, ComponentLink1URL=http://products.sumida.com/products/pdf/CDRH104R.pdf, Height - Seated (Max)="0.157\" (4.00mm)", Manufacturer Part Number=CDRH104RNP-5R2NC, Material - Core=Ferrite, Mounting Type="Surface Mount", Packaging="Cut Tape (CT)", Part Status=Active, Pricing 1="1=2.9, 10=2.678, 100=1.8743, 500=1.5173 (NZD)", Q @ Freq=-, Ratings=-, RoHS="RoHS Compliant", Shielding=Shielded, Size / Dimension="0.402\" L x 0.394\" W (10.20mm x 10.00mm)", Stock 1=3849, Supplier 1=Digi-Key, Supplier Device Package=-, Type=-
MT1 MT2 MT3: library part MC_M2.6_HOLE, "Fixing M2.6 Mount Hole NPTH", Manufacturer=Hi-Q, Manufacturer PN="2BV series M2.5 Clearance", Price=0, Supplier="ECE Dept"
P1 P2 P3: "Header, 3-Pin", LatestRevisionDate=17-Jul-2002, LatestRevisionNote="Re-released for DXP Platform.", Publisher="Altium Limited"
P4: "Header, 6-Pin", LatestRevisionDate=17-Jul-2002, LatestRevisionNote="Re-released for DXP Platform.", Publisher="Altium Limited"
P5: "Header, 2-Pin", LatestRevisionDate=17-Jul-2002, LatestRevisionNote="Re-released for DXP Platform.", Publisher="Altium Limited"
PO PO2 PO3: library part TM_BSH105, "MOSFET N-CH 20V 1.05A SOT-23", Current - Continuous Drain (Id) @ 25° C=1.05A, Drain to Source Voltage (Vdss)=20V, Input Capacitance (Ciss) @ Vds="152pF @ 16V", Manufacturer="NXP Semiconductors", Package / Case="TO-236-3, SC-59, SOT-23-3", Power - Max=417mW, Supplier Part Number 1=1758066, FET Type="MOSFET N-Channel, Metal Oxide", Gate Charge (Qg) @ Vgs="3.9nC @ 4.5V", Manufacturer Part Number=BSH105,215, Pricing="1=0.53, 10=0.42, 25=0.3544, 100=0.2885, 250=0.23896, 500=0.1974, 1000=0.14785 (NZD)", Rds On (Max) @ Id, Vgs="200 mOhm @ 600mA, 4.5V", Storage Location="PCB Assembly WS", Supplier="ECE Dept", Supplier 1=Farnell, Supplier 2=Digi-Key, Supplier Part Number 2=568-6215-1-ND
Q1: library part TM_SSM3J328R, "MOSFET P-CH 20V 6A SOT23-3", Case/Package=SOT-23-3, Continuous Drain Current (ID)=6A, Drain to Source Breakdown Voltage=-20V, Drain to Source Resistance=47.4mR, Drain to Source Voltage (Vdss)=20V, Gate to Source Voltage (Vgs)=8V, Input Capacitance=840pF, Input Capacitance (Ciss) @ Vds="840pF @ 10V", Manufacturer=Toshiba, Max Operating Temperature=150°C, Max Power Dissipation=1W, Min Operating Temperature=-55°C, Package / Case="SOT-23-3 Flat Leads", Package Quantity=3000, Power Dissipation=2W, Supplier Device Package=SOT-23F, Supplier Part Number=SSM3J328RLFDKR-ND, ComponentLink1Description=https://datasheet.ciiva.com/11158/ssm3j328r-datasheet-en-20140301-11158652.pdf, ComponentLink1URL=https://datasheet.ciiva.com/11158/ssm3j328r-datasheet-en-20140301-11158652.pdf, Current - Continuous Drain (Id) @ 25° C=6A, Element Configuration=Single, FET Feature="Logic Level Gate, 1.5V Drive", FET Type="MOSFET P-Channel, Metal Oxide", Gate Charge (Qg) @ Vgs="12.8nC @ 4.5V", Manufacturer Part Number=SSM3J328R,LF, Mount="Surface Mount", Number of Channels=1, Number of Elements=1, Number of Pins=3, Packaging="Tape and Reel", Power - Max=1W, Pricing="1=0.79, 10=0.658, 25=0.5772, 100=0.4939, 250=0.42836, 500=0.36284, 1000=0.27972 (NZD)", Radiation Hardening=No, Rds On Max=29.8mR, Storage Location="PCB Assembly WS", Supplier=Digi-Key, Supplier 1=Digi-Key, Supplier Part Number 1=SSM3J328RLFDKR-ND, Turn-Off Delay Time=107ns, Turn-On Delay Time=32ns, Vgs(th) (Max) @ Id="1V @ 1mA"
R1: library part RS_27K, "RES 27K OHM 1/10W 5% 0603 SMD", Storage Location="PCB Assembly WS", Supplier="ECE Dept"
R2: library part RS_47K, "RES 47.0K OHM 1/10W 5% 0603 SMD", Storage Location="PCB Assembly WS", Supplier="ECE Dept"
R3 R4: library part RS_27R, "RES 27 OHM 1/10W 5% 0603 SMD", Storage Location="PCB Assembly WS", Supplier="ECE Dept"
R5: library part RT_1R, "RES 1R OHM 1/4W 5% 1206 SMD", Storage Location="PCB Assembly WS", Supplier="ECE Dept"
R6: library part RS_3K, "RES 3K OHM 1/10W 5% 0603 SMD", Storage Location="PCB Assembly WS", Supplier="ECE Dept"
R7 R17 R19 R20 R21 R22 R23 R24 R27 R31 R32: library part RS_2K, "RES 2K OHM 1/10W 5% 0603 SMD", Storage Location="PCB Assembly WS", Supplier="ECE Dept"
R8 R10 R11 R14: library part RS_0R0, "RES 0.0 OHM 1/10W 5% 0603 SMD", Storage Location="PCB Assembly WS", Supplier="ECE Dept"
R9 R12: library part RS_100K, "RES 100K OHM 1/10W 5% 0603 SMD", Storage Location="PCB Assembly WS", Supplier="ECE Dept"
R13: library part RS_68K, "RES 68.0K OHM 1/10W 5% 0603 SMD", Storage Location="PCB Assembly WS", Supplier="ECE Dept"
R15 R16: library part RS_2K2, "RES 2.2K OHM 1/10W 5% 0603 SMD", Storage Location="PCB Assembly WS", Supplier="ECE Dept"
R18: library part RT_0R, "RES 0R OHM 1/8W 5% 1206 SMD", Storage Location="PCB Assembly WS", Supplier="ECE Dept"
R25: library part RS_3K3, "RES 3.3K OHM 1/10W 5% 0603 SMD", Storage Location="PCB Assembly WS", Supplier="ECE Dept"
R26 R28 R29 R30: library part RS_10K, "RES 10.0K OHM 1/10W 5% 0603 SMD", Storage Location="PCB Assembly WS", Supplier="ECE Dept"
S1 S2: library part WS_EVQPNF05M, "Panasonic 6 x 3.5mm SMD Light Touch Switch Type SMD", Manufacturer=Panasonic, Supplier Part Number 1=2079481, Manufacturer PN=EVQPNF05M, PackageDescription="6.0 x 3.5 mm", Storage Location="PCB Assembly WS", Supplier="ECE Dept", Supplier 1=Farnell, Supplier 2=Digi-Key, Supplier Part Number 2=P13598SCT-ND
S3: "DIP Switch, 2 Position, SPST SMD", Contact Current DC Max=25, Manufacturer="OMRON ELECTRONIC COMPONENTS", Manufacturer Part Number=A6SN-2101, Supplier Part Number 1=2029424, Contact Configuration=SPST, External Length / Height=7, No. of Switch Positions=2, PackageReference=DIP-4, Pitch Spacing=2.54, Storage Location="PCB Assembly WS", Supplier="ECE Dept", Supplier 1=Farnell
TP1 TP2 TP3 TP4 TP5 TP6 TP7 TP8 TP9 TP10 TP11 TP12 TP13 TP14 TP15 TP16 TP17 TP18 TP19 TP20 TP21 TP22 TP23 TP24 TP25 TP26 TP27 TP28 TP29 TP30: library part TP_1206, "Test-Point 3.3x1.6x2.1mm SMD", Manufacturer="Harwin Inc", Manufacturer Part Number=S1751-46R, Supplier Part Number 1=952-1478-2-ND, Mounting Type="Surface Mount", Storage Location=ProtoPlace, Supplier="ECE Dept", Supplier 1=Digi-Key, Supplier 2=Farnell, Supplier Part Number 2=1826282, Type="PC Test Point"
U1: library part SE_ATSAM4S16BA-MU, "IC MCU 32BIT 512KB FLASH 64LQFP", Manufacturer=Atmel, Package / Case=64-LQFP, Supplier Part Number 1=ATSAM4S8BA-ANRCT-ND, Voltage - Supply (Vcc/Vdd)="1.62 V ~ 3.6 V", Code_JEDEC=MO-220VMMD-3, ComponentLink1Description="Manufacturer URL", ComponentLink1URL=http://www.atmel.com/, ComponentLink2Description="SAM4S Series Datasheet", ComponentLink2URL=http://www.atmel.com/dyn/resources/prod_documents/11100.pdf, ComponentLink3Description="SAM4S Series Summary", ComponentLink3URL=http://www.atmel.com/dyn/resources/prod_documents/11100S.pdf, Connectivity="I²C, IrDA, Memory Card, SPI, SSC, UART/USART, USB", Core Processor="ARM® Cortex®-M4", Core Size=32-Bit, Data Converters="A/D 11x12b, D/A 2x12b", Manufacturer Part Number=ATSAM4S8BA-ANR, Number of I/O=47, PackageDescription="64-Pin Quad Flat No-Lead (QFN) Sawn, 9 x 9 x 1.0 mm Body, 0.5 mm Pitch, Exposed Pad", PackageReference=64PS, PackageVersion="revJ, Jul-2007", Packaging="Cut Tape (CT)", Peripherals="Brown-out Detect/Reset, DMA, POR, PWM, WDT", Program Memory Size="512KB (512K x 8)", Program Memory Type=FLASH, RAM Size="128K x 8", Speed=120MHz, Supplier 1=Digi-Key
U2 U4: library part SV_CAT6219-330TDGT3, "IC REG LIN 3.3V 500MA TSOT23-5", Base Part Number=CAT6219, Current - Output=500mA, Package / Case="SOT-23-5 Thin, TSOT-23-5", Supplier Device Package=TSOT-23-5, Supplier Part Number=CAT6219-330TDGT3CT-ND, Voltage - Input (Max)=5.5V, Voltage - Output (Min/Fixed)=3.3V, Voltage Dropout (Max)="0.5V @ 500mA", ComponentLink1Description=http://www.onsemi.com/pub/Collateral/CAT6219-D.PDF, ComponentLink1URL=http://www.onsemi.com/pub/Collateral/CAT6219-D.PDF, ComponentLink2Description="CAT6219 Datasheet", ComponentLink2URL=\\maxwell\elecapp\AltiumDesigner\Libraries\DatasheetsNew\ENCE461\CAT6219-D.PDF, Manufacturer Part Number=CAT6219-330TDGT3, Supplier=Digi-Key, Supplier 1=Digi-Key
U3: library part ADP2302ARDZ-5.0-R7, "IC REG BUCK 5V 2A 8SOIC", Current - Output=2A, Frequency - Switching=700kHz, Supplier Part Number 1=ADP2302ARDZ-5.0-R7CT-ND, Voltage - Input (Max)=20V, Voltage - Output (Min/Fixed)=5V, ComponentLink1Description="ADP2302ARDZ-5.0 Datasheet", ComponentLink1URL=\\maxwell\elecapp\AltiumDesigner\Libraries\DatasheetsNew\ENCE461\ADP2302_2303.pdf, Manufacturer_Part_Number=ADP2302ARDZ-5.0-R7, Output Type=Fixed, Supplier 1=Digi-Key, Type=DEV, Vendor="Analog Devices Inc"
U5: library part NRF24, "nRF24 SMD Module", Warning="No power planes near or under device"
U6: "1.8V - 5V level converter"
U7: "Dual H-Bridge Motor Driver 1.5A", ComponentLink1Description="DRV8833 Datasheet", ComponentLink1URL=\\maxwell\elecapp\AltiumDesigner\Libraries\DatasheetsNew\ENCE461\drv8833pwpr.pdf
Y1: library part XT_CRYSTAL_12MHz_18pF, "CRYSTAL 12MHZ 18PF 6X3.5mm SMD", ESR (Equivalent Series Resistance)="60 Ohm", Frequency Stability=±50ppm, Frequency Tolerance=±30ppm, Load Capacitance=18pF, Manufacturer="CTS-Frequency Controls", Manufacturer Part Number=406C35D12M00000, Operating Mode=Fundamental, Operating Temperature="-20°C ~ 70°C", Package / Case="4-SMD, No Lead (DFN, LCC)", Supplier Part Number 1=CTX855CT-ND, Frequency=12MHz, Height="0.047\" (1.20mm)", Mounting Type="Surface Mount", Size / Dimension="0.236\" L x 0.138\" W (6.00mm x 3.50mm)", Supplier 1=Digi-Key

## Via types
v1: diameter 0.8, hole 0.3, Top Layer to Bottom Layer, 45 vias
v2: diameter 1, hole 0.5, Top Layer to Bottom Layer, 43 vias
v3: diameter 2.2, hole 1.6, Top Layer to Bottom Layer, 1 vias
v4: diameter 2, hole 1.5, Top Layer to Bottom Layer, 1 vias

## Nets (pads, with @x,y where several pads share a name; then routed paths per layer and width w, separated by ;. In a path a pad name is that pad's centre, name@x,y a point inside that pad or via, vN(x,y) a via of type N, cw(c..) or ccw(c..) an arc to the next point about the centre after c; other vN are vias at no path point)
3V3: C5.2 C7.2 C9.2 C11.2 C13.2 C28.2 DL1.2 DL2.2 DL3.2 H2.7 H2.8 P1.2 P2.2 R11.2 TP1.1 U1.1 U1.7 U1.18 U1.45 U1.58 U6.1 U6.5 | length 57.3
  Top Layer w0.2: U6.5 3.4,40.7 3.8,41.1 3.95,41.1 4.35,41.5 U6.1 ; U6.1@4.4,42.425 U6.1@4.4,42.75 ; U1.58 38.189,60.75 38.264,60.825 38.523,60.825 38.598,60.9 38.7,60.9 38.999,61.199
  Top Layer w0.3: v1(1.6,43.8) 1.53,43.73 1.53,43.15 1.2,42.82 1.2,39.082 3,37.282 3,36.124 1.916,35.04 1.916,34.056 P1.2 3.4,34.04 P2.2 ; TP1.1 v2(4.6,49.9) ; U6.1@4.4,42.75 4.4,45.1 4.2,45.3 4.2,45.35 3.95,45.6 C28.2 v1(5.3,45.6) ; C7.2@23.8,63.9 23.85,63.9 24.05,63.7 24.05,63.6 24.4,63.25 U1.18@26.268,63.25 ; v2(24.9,65.7) 24.9,64.003 25.628,63.275 ; U1.18@26.298,63.25 U1.18 ; v2(27.4,45.4) 27.425,45.375 29.875,45.375 R11.2@29.9,45.35 ; v2(32.9,62.9) 32.775,63.025 32.775,65.5 U1.7 32.75,66.56 33,66.81 C5.2 ; v1(33.3,56.1) 33.435,56.1 33.782,55.754 34.046,55.754 34.225,55.575 U1.45@34.225,55.1 ; C9.2 34.25,52.65 U1.45 ; v1(34.4,69.2) 35.3,68.3 C13.2 35.75,68.15 U1.1 ; DL2.2 35.423,44.623 35.423,44.072 34.5,43.149 v1(34.5,43.1) DL1.2 ; 38.999,61.199 39.299,61.199 39.4,61.3 C11.2 40.877,61.877 41.141,61.877 41.465,62.2 v1(41.6,62.2) ; DL3.2 50.9,21.2 v1(52.2,21.2)
3V3_RADIO: DL4.2 L3.2 R14.2 | length 5.7
  Top Layer w0.3: L3.2 12.6,46.5 R14.2 15.3,46.55 DL4.2 ; L3.2@12.5,46.7 L3.2@12.8,47
5V: C1.1 C17.1 C27.2 H6.1 P1.1 P2.1 P3.2 U2.1 U2.3 U4.1 U6.6 | length 15.3
  Top Layer w0.3: v1(4.2,37.85) 4.2,38.95 4.35,39.1 U6.6 ; C27.2 H6.1@8.4,38.16 ; C17.1 14.3,37.811 13.9,38.211 v2(13.9,38.4) 13.9,39.15 14.5,39.75 U4.1 ; C1.1 28.35,38.45 U2.1 28.35,40.525 28.45,40.625 30.15,40.625 30.25,40.525 U2.3 31,39 v2(31,38.1)
5V_BUCK: P3.1 R10.2 | length 2.7
  Top Layer w1: P3.1@14.14,30 15.25,30 15.9,30.65 R10.2
ACTUATOR1: R27.1 TP28.1 U1.9 | length 29.8
  Top Layer w0.3: v1(31.471,63.729) 31.567,63.824 31.567,64.306 31.75,64.49 U1.9 ; v2(47,65.8) 47,64.045 48.4,62.645 48.4,61.1 50.45,59.05 51.4,59.05 51.4,57.2 TP28.1
  Bottom Layer w0.3: v1(31.471,63.729) 31.492,63.75 35.05,63.75 37.1,65.8 v2(47,65.8)
ACTUATOR2: R31.1 TP29.1 U1.13 | length 28.2
  Top Layer w0.3: v1(29.7,63.6) 29.725,63.625 29.725,65.5 U1.13 ; v1(29.791,60.97) 29.791,60.909 31.95,58.75 33.811,58.75 34.661,57.9 v1(35.7,57.9) ; v1(38.5,55.3) 39.893,53.907 39.893,53.247 40.85,52.289 40.85,52.148 41.348,51.65 42.052,51.65 42.131,51.729 42.38,51.729 43.4,50.709 43.4,49.55 R31.1 45.8,47.15 TP29.1
  Bottom Layer w0.3: v1(29.7,63.6) 29.7,61.06 v1(29.791,60.97) ; v1(35.7,57.9) 35.8,57.9 38.4,55.3 v1(38.5,55.3)
ACTUATOR3: R32.1 TP30.1 U1.42 | length 31.7
  Top Layer w0.3: U1.42 32.75,53.202 32.312,52.765 32.312,51.167 32,50.855 32,47.155 32.455,46.7 33.295,46.7 33.75,46.245 33.75,43.411 33.75,37.505 37.305,33.95 39.974,33.95 40.374,34.35 41.95,34.35 TP30.1 ; TP30.1@43.3,35.2 43.3,35.95 R32.1
AIN1: TP25.1 U1.25 U7.16 | length 51.7
  Top Layer w0.3: U1.25 30.243,59.75 32.743,57.25 33.257,57.25 34.907,55.6 35.947,55.6 40.897,50.65 42.045,50.65 42.4,50.295 42.4,41.2 v1@41,39.8 ; v2(37.9,29.8) 37.9,28.8 41,25.7 U7.16 ; TP25.1 38.1,40.1 v1(41,40.1)
  Bottom Layer w0.3: v2(37.9,29.8) 37.9,36.7 v1@41,39.8
AIN2: TP24.1 U1.4 U7.15 | length 51
  Top Layer w0.3: v1(33.4,58) 35.3,56.1 36.154,56.1 41.104,51.15 42.252,51.15 42.9,50.502 42.9,39.218 41.9,38.218 41.9,38.214 41.136,37.45 39.5,37.45 38.35,36.3 TP24.1@38.35,36.15 ; v1(33.4,60) 33.4,61.491 34.25,62.341 U1.4 ; TP24.1@38.35,36.05 39.1,36.05 39.4,35.75 v1@39.4,34.8 ; v2(39.2,29.2) 39.2,28.3 41.65,25.85 U7.15
  Bottom Layer w0.3: v1(33.4,58) v1(33.4,60) ; v2(39.2,29.2) 39.3,29.3 v1(39.3,34.7)
BIN1: TP23.1 U1.63 U7.9 | length 55.2
  Top Layer w0.3: v1(35.7,60.6) 35.696,60.604 35.696,62.596 36.35,63.25 U1.63 ; U7.9 45.889,24.939 46.146,24.939 ; v2(49.1,29.2) 49.1,27.893 46.146,24.939 ; TP23.1 49.961,24.939 46.146,24.939
  Bottom Layer w0.3: v1(35.7,60.6) 34.95,59.85 34.95,57.589 35.389,57.15 35.457,57.15 38.107,54.5 42.5,54.5 46.5,50.5 46.5,31.8 v2(49.1,29.2)
BIN2: TP22.1 U1.3 U7.10 | length 55.7
  Top Layer w0.3: v1(34.4,61) 34.4,61.668 34.75,62.018 U1.3 ; U7.10 44.9,25.4 45.979,26.479 46.979,26.479 47.8,27.3 47.8,28.3 v2(47.7,28.4) 47.7,29.4 48.573,30.273 50.273,30.273 TP22.1
  Bottom Layer w0.3: v1(34.4,61) 34.4,57.432 35.182,56.65 35.25,56.65 37.9,54 41.5,54 45,50.5 45,31.5 47.566,28.934 47.566,28.534 v2(47.7,28.4)
BUMP_DETECT: R17.1 U1.37 | length 19.5
  Top Layer w0.3: R17.1 23.3,46.105 25.55,48.355 25.55,49.25 26.75,50.45 27.25,50.45 30.25,53.45 U1.37
D_N: H1.2 R4.1 TP4.1 | length 6.2
  Top Layer w0.381: TP4.1@55.3,66.6 55.3,68.15 56.15,69 R4.1 ; R4.1@56.15,69.2 57.072,69.2 57.295,68.977 57.295,68.953 57.89,68.358 59.093,68.358 H1.2
D_P: H1.3 R3.1 TP3.1 | length 6.6
  Top Layer w0.381: TP3.1@55.4,73.4 55.4,71.85 56.25,71 56.25,70.8 56.41,70.64 56.51,70.64 57.315,69.835 57.335,69.835 57.93,69.24 57.93,69.216 58.153,68.993 59.093,68.993 H1.3
GND: C1.2 C2.1 C3.1 C4.1 C5.1 C6.2 C7.1 C8.2 C9.1 C10.2 C11.1 C12.2 C13.1 C15.1 C16.2 C17.2 C19.1 C20.1 C21.1 C22.1 C23.1 C25.1 C26.2 C27.1 C28.1 D3.1 H1.5 H1.6 H2.5 H2.6 H3.1 H3.3 H5.1 H5.2 H6.3 H10.3 H11.3 H12.3 P1.3 P2.3 P4.6 P5.2 PO2.2 PO3.2 PO.2 Q1.1 R2.1 R5.1 R13.1 R15.1 R16.1 R26.1 R28.1 R29.1 R30.1 S1.1 S2.1 S3.1 S3.2 U1.2 U1.17 U1.46 U1.60 U2.2 U3.6 U3.7 U3.EPAD U4.2 U5.2 U6.2 U7.3 U7.6 U7.13 U7.17 | length 136.2
  Top Layer w0.3: v2(2.3,47) C28.1 ; C23.1 3.2,63.2 v2(3.8,63.8) 3.8,66.986 U5.2 ; v1(3.2,43.9) 3.2,43.765 3.4,43.565 U6.2 ; v2(5.7,59.1) S3.1 ; v2@5.8,56.56 S3.2 S3.2@8.44,56.2 ; R13.1 8.05,22.2 8.25,22 v2(8.9,22) ; H6.3@8.24,43.24 H6.3@8.4,43.24 ; C27.1 v2(9.9,34.6) ; H3.1 10.64,15.9 D3.1 ; C17.2 16,37.1 ; U4.2 v2(16,38.1) 16,37.1 ; U3.7 14.285,24.865 C20.1 14.1,25.9 14.335,26.135 U3.6 ; C22.1 v2(18.7,44.1) ; R26.1 16,36.55 16,37.1 ; v1(19.9,50.5) 19.95,50.45 R16.1@19.95,47.8 ; v2(21.3,65.5) 21.76,65.04 21.76,64.69 22.4,64.05 C7.1@22.4,63.9 ; v1(21.7,60.7) 21.796,60.604 22.346,60.604 22.55,60.4 C10.2@23.2,60.4 ; v1(22,47.3) 22,47.35 S1.1 ; v2(23.7,19.7) 23.7,21.8 23.8,21.9 C21.1 ; U1.17 v2(26.475,64.675) ; C8.2 29.25,70.15 v2(29.25,71.6) ; U2.2 29.3,38.4 C1.2 v2(29.5,36.7) ; v1(31.3,45.7) 32.8,45.7 C2.1 ; C6.2@31.85,70 32,70.15 32,70.649 32.451,71.1 v2(32.5,71.1) 32.634,70.966 32.634,70.777 32.7,70.711 32.7,70.05 32.95,69.8 C5.1 ; C9.1 33.95,50.9 34.2,50.65 v1(34.2,49.4) ; C9.1@34.1,51 34.75,51.65 U1.46 ; v2(34.4,67.4) 35.25,66.55 U1.2 ; v2(34.6,71.1) 34.734,70.966 34.984,70.966 35.6,70.35 C13.1 ; C15.1 36.65,75.8 v1(39.2,75.8) 39.2,74.05 R5.1@39.05,73.9 ; C3.1@37.2,69.1 C3.1@37.2,69.3 ; C3.1 37.4,70.4 v2@38.55,71.55 ; U1.60 39.143,61.75 39.193,61.8 39.4,61.8 C11.1 40.35,62.7 41.204,63.554 41.204,63.904 v1(41.3,64) ; v2@38.6,71.6 40.05,71.6 40.15,71.7 C4.1 ; C12.2 42,56.8 v1(42.5,57.3) ; v2(41,30.3) 41.5,29.8 C26.2 41.6,28.9 C25.1@43.7,28.9 ; S2.1@41.05,49.1 41.05,47.114 41.4,46.764 41.4,46.685 41.65,46.435 v1(41.65,46.3) ; U7.3 42.3,17.938 42.4,17.838 v2(42.4,16.9) ; U7.13 42.95,22.125 v3(43.275,21.8) ; U7.6 44.25,16.35 v2(44.8,15.8) ; R29.1 46.824,48.65 47,48.826 PO2.2 47.2,49.45 48.45,48.2 48.45,48.05 v2(48.5,48) ; R30.1 46.1,37.55 PO3.2 47.3,36.7 v2(48,36) ; v1(47.9,19.2) R15.1 ; v1(49.55,61.7) 49.55,61.75 50.15,62.35 R2.1 ; R28.1 52.6,59.8 v1(53.2,59.2) 53.2,59.335 53.523,59.659 53.523,59.923 PO.2 ; H1.5 H1.6@59.1,71.5 ; H1.6@61.8,65.5 H1.6@61.8,68 ; H1.6@61.8,70 H1.6@61.8,72.5
  Top Layer w1: H3.3 4.06,16.66 C16.2 4.4,17 Q1.1 ; C19.1 11.5,24.25 12.55,23.2 v2(13.05,23.2) 14.1,24.25 C20.1
  Bottom Layer w0.3: v2@5.7,56.6 v2(5.8,56.6)
  other v2: 38.6,71.5
  other v4: 19,25.5
LED_DATA: U1.20 U6.3 | length 47.6
  Top Layer w0.3: U6.3@2.4,42.322 v1(2.4,44.9) ; v1(23.5,62.7) 23.519,62.7 23.969,62.25 U1.20 ; v1(25.9,51.9) 25.9,53 v1(27.28,54.38)
  Bottom Layer w0.3: v1(2.4,44.9) 9.4,51.9 v1(25.9,51.9) ; v1(23.5,62.7) 27.024,62.7 27.8,61.924 27.8,54.9 v1(27.28,54.38)
LED_DATA_5V: H6.2 U6.4 | length 10.6
  Top Layer w0.3: U6.4@2.5,39.975 2.5,38.489 3.889,37.1 4.511,37.1 5.2,37.789 5.2,39.768 6.132,40.7 H6.2@8.4,40.7
MISO: TP18.1 U1.27 U5.7 | length 20.6
  Top Layer w0.3: U5.7 10.143,65.5 12.496,63.146 15.053,60.59 19.326,60.59 21.166,58.75 U1.27
MOSI: TP17.1 U1.22 U5.6 | length 25.6
  Top Layer w0.3: U5.6 8.871,68.5 8.971,68.6 16.9,68.6 18.7,66.8 18.7,65.248 ; TP17.1 18.7,64.9 18.7,65.248 ; U1.22 26.45,61.225 24.434,61.225 24.409,61.25 22.698,61.25 18.7,65.248
MOTOR_NFAULT: U1.38 U7.8 | length 54.9
  Top Layer w0.3: v1(30.174,51.484) 30.174,52.567 30.75,53.143 U1.38 ; U7.8 47,17.55 v2(47,14.5)
  Bottom Layer w0.3: v1(30.174,51.484) 31.6,50.058 31.6,47.561 33.75,45.411 33.75,29.15 37.95,24.95 37.95,19.148 42.598,14.5 v2(47,14.5)
MOTOR_NSLEEP: U1.41 U7.1 | length 40.2
  Top Layer w0.3: 31.812,52.573 31.812,53.002 32.25,53.44 U1.41 ; v2(38.8,19.5) 40.1,19.5 40.6,19 U7.1
  Bottom Layer w0.3: v1(31.562,52.188) 32.1,51.65 32.1,49.2 35.402,45.898 35.402,30.237 38.8,26.839 v2(38.8,19.5)
NetC2_2: C2.2 R11.1 TP13.1 U2.4 U2.5 | length 11.3
  Top Layer w0.3: 32.05,43.95 30.4,43.95 ; TP13.1 30.95,42.45 U2.4 U2.5 28.35,42.6 R11.1 30.4,43.95 ; C2.2@32.55,43.95 30.4,43.95 ; C2.2@32.75,43.85 C2.2
NetC3_2: C3.2 U1.62 Y1.3 | length 7.3
  Top Layer w0.3: C3.2 38.9,67.7 Y1.3 ; U1.62 38.724,62.75 38.9,62.926 Y1.3@38.9,66.7
NetC4_2: C4.2 U1.61 Y1.1 | length 13.5
  Top Layer w0.3: U1.61 38.931,62.25 39.5,62.819 39.5,63.845 40.501,64.846 40.501,66.246 42.823,68.568 42.823,68.823 Y1.1 43.7,70.2 C4.2
NetC6_1: C6.1 C8.1 C10.1 C12.1 L1.2 TP8.1 U1.8 U1.12 U1.24 U1.54 | length 44.4
  Top Layer w0.3: C10.1 24.65,60.25 U1.24 26.5,60.275 28.035,60.275 29.791,62.03 ; C8.1@29.2,68.934 29.2,67.61 30.25,66.56 U1.12 30.25,64.3 30.65,63.9 30.65,62.89 ; L1.2 31.6,71.7 30.8,70.9 30.8,69.255 31.305,68.75 31.4,68.75 31.6,68.55 31.6,67.4 32.25,66.75 U1.8 32.25,63.452 32.05,63.252 32.05,63.247 31.692,62.89 30.65,62.89 ; TP8.1 45.9,58.2 C12.1 40.85,58.15 40.111,58.15 39.536,58.725 38.15,58.725 38.125,58.75 34.518,58.75 34.018,59.25 32.571,59.25 29.791,62.03 ; 29.791,62.03 30.65,62.89
NetC14_1: C14.1 R5.2 | length 3.9
  Top Layer w0.2: C14.1 35.3,76.5 35.3,75.1 36.3,74.1 R5.2
NetC14_2: C14.2 C15.2 L1.1 U1.64 | length 14.7
  Top Layer w0.3: C14.2 C15.2 L1.1 36.401,71.299 36.401,65.259 37.525,64.135 U1.64
NetC16_1: C16.1 F1.1 H3.2 TP9.1 | length 9.5
  Top Layer w0.3: C16.1@5.7,17.094 6.724,17.094 6.9,17.27 6.9,18.294 7.106,18.5 TP9.1 ; F1.1@5.75,19.4 5.75,17.094 5.75,16.75 C16.1 6.6,15.8 H3.2
NetC18_1: C18.1 D3.2 L2.1 U3.8 | length 19.7
  Top Layer w0.3: U3.8 18.162,22.121 18.162,22.093 19.278,20.977 19.307,20.977 C18.1@19.8,20.484
  Top Layer w1: C18.1@19.8,20.484 20.975,19.309 D3.2 22.7,14.175 L2.1
NetC18_2: C18.2 U3.1 | length 2.4
  Top Layer w0.3: C18.2 19.8,22.084 U3.1
NetC19_2: C19.2 C20.2 L2.2 R10.1 TP11.1 U3.5 | length 38.4
  Top Layer w0.3: C19.2 C20.2 14.445,27.405 U3.5 16.6,27.494 R10.1 19.75,29.15 TP11.1
  Top Layer w1: C19.2 12.227,27.023 11.083,27.023 9.95,25.89 9.95,24.103 12.053,22 12.2,22 16.4,17.8 16.4,13.5 13.5,10.6 L2.2
NetC21_2: C21.2 F2.2 R9.1 U3.2 U3.3 | length 12.1
  Top Layer w0.3: U3.2 21.876,24.3 C21.2 ; U3.3 23.985,26.135 R9.1 C21.2@24,24.5 ; C21.2@24.25,24.75 C21.2@24,24.5 ; F2.2 25.15,24.3 C21.2 ; C21.2 C21.2@24,24.5
NetC22_2: C22.2 R14.1 TP15.1 U4.4 U4.5 | length 15.4
  Top Layer w0.3: U4.4 U4.5 15.05,43.95 C22.2 15.3,44.2 15.3,45.424 15.476,45.6 15.85,45.6 R14.1 16.95,46.7 19.145,46.7 19.35,46.905 19.35,48.095 18.51,48.935 18.365,48.935 17.524,49.776 17.524,51.776 TP15.1@17.5,51.8
NetC23_2: C23.2 L3.1 U5.1 | length 25.6
  Top Layer w0.3: U5.1@2.4,66.886 U5.1 2.514,64.614 C23.2 2.4,64.5 2.4,63.95 1.905,63.95 1.7,63.745 1.7,55.6 6.05,51.25 11.6,51.25 12.3,50.55 L3.1
NetC24_1: C24.1 U7.11 | length 3.8
  Top Layer w0.2: U7.11 44.25,25.662 44.88,26.293 44.993,26.293 C24.1
NetC24_2: C24.2 C25.2 R18.1 U7.12 | length 9.4
  Top Layer w0.3: R18.1 45.25,30.35 46.026,29.574 46.026,29.15 46.053,29.122 C24.2@46.2,29.122 ; U7.12 43.6,25.8 44.3,26.5 C25.2 44.6,27.3 C24.2
NetC26_1: C26.1 U7.14 | length 3.1
  Top Layer w0.3: C26.1 41.634,27.266 41.634,26.573 42.3,25.907 U7.14
NetDL1_1: DL1.1 R6.1 | length 1.8
  Top Layer w0.3: DL1.1 R6.1
NetDL2_1: DL2.1 R25.1 | length 1.8
  Top Layer w0.3: DL2.1 39.3,45.2 R25.1
NetDL3_1: DL3.1 R15.2 | length 2.5
  Top Layer w0.3: DL3.1 49.2,20.75 R15.2
NetDL4_1: DL4.1 R16.2 | length 2.4
  Top Layer w0.3: DL4.1 17.65,48.7 18.123,48.227 18.123,48.027 R16.2
NetF1_2: F1.2 Q1.3 R8.1 | length 6.9
  Top Layer w0.3: F1.2 2.7,18.95 2.7,22.25 2.55,22.4 Q1.3 2.4,24.65 R8.1
NetH7_1: H7.1 TP26.1 U7.2 | length 21.2
  Top Layer w0.3: TP26.1 31.123,24.223 31.123,23.863 H7.1 31.024,21.3 34.824,17.5 41.2,17.5 41.65,17.95 ; 41.65,17.951 U7.2@41.65,18.675
NetH7_2: H7.2 U7.4 | length 10.7
  Top Layer w0.3: H7.2 40.88,21.3 41.935,20.245 42.412,20.245 42.95,19.707 U7.4
NetH8_1: H8.1 TP27.1 U7.7 | length 19.8
  Top Layer w0.3: TP27.1 40.077,3.877 41.517,3.877 H8.1@42.7,5.06 ; H8.1 45.75,7.65 45.75,16.35 44.9,17.2 U7.7
NetH8_2: H8.2 U7.5 | length 8.7
  Top Layer w0.3: H8.2 43.6,10.58 U7.5
NetH10_1: H10.1 PO.3 | length 4.1
  Top Layer w0.3: PO.3 H10.1@59.41,61.35 ; H10.1@59.61,61.15 H10.1@60.1,61.64
NetH11_1: H11.1 PO2.3 | length 8.5
  Top Layer w0.3: PO2.3 53.945,50.4 55.485,51.94 H11.1
NetH12_1: H12.1 PO3.3 | length 8.7
  Top Layer w0.3: PO3.3@49.4,38.4 PO3.3 54.56,38.5 H12.1
NetP4_1: P4.1 R7.2 | length 2.5
  Top Layer w0.3: P4.1 24.28,81.17 R7.2
NetP4_2: P4.2 R22.2 | length 2.7
  Top Layer w0.3: R22.2 26.82,80.53 P4.2 P4.2@27,82.52
NetP4_3: P4.3 R19.2 | length 2.5
  Top Layer w0.3: R19.2 29.36,80.49 P4.3 P4.3@29.5,82.56
NetP4_4: P4.4 R20.2 | length 2.3
  Top Layer w0.3: R20.2 P4.4